# Altium PCB mainV2.PcbDoc (part 2 of 2)
Units mm, origin at the board's own origin, x right, y up, seen from the top; angles counter-clockwise.
Board outline 72.95 x 37.26 mm, 2 copper layers (Top Layer, Bottom Layer); 97 components, 79 nets, 317 pads, 139 vias.
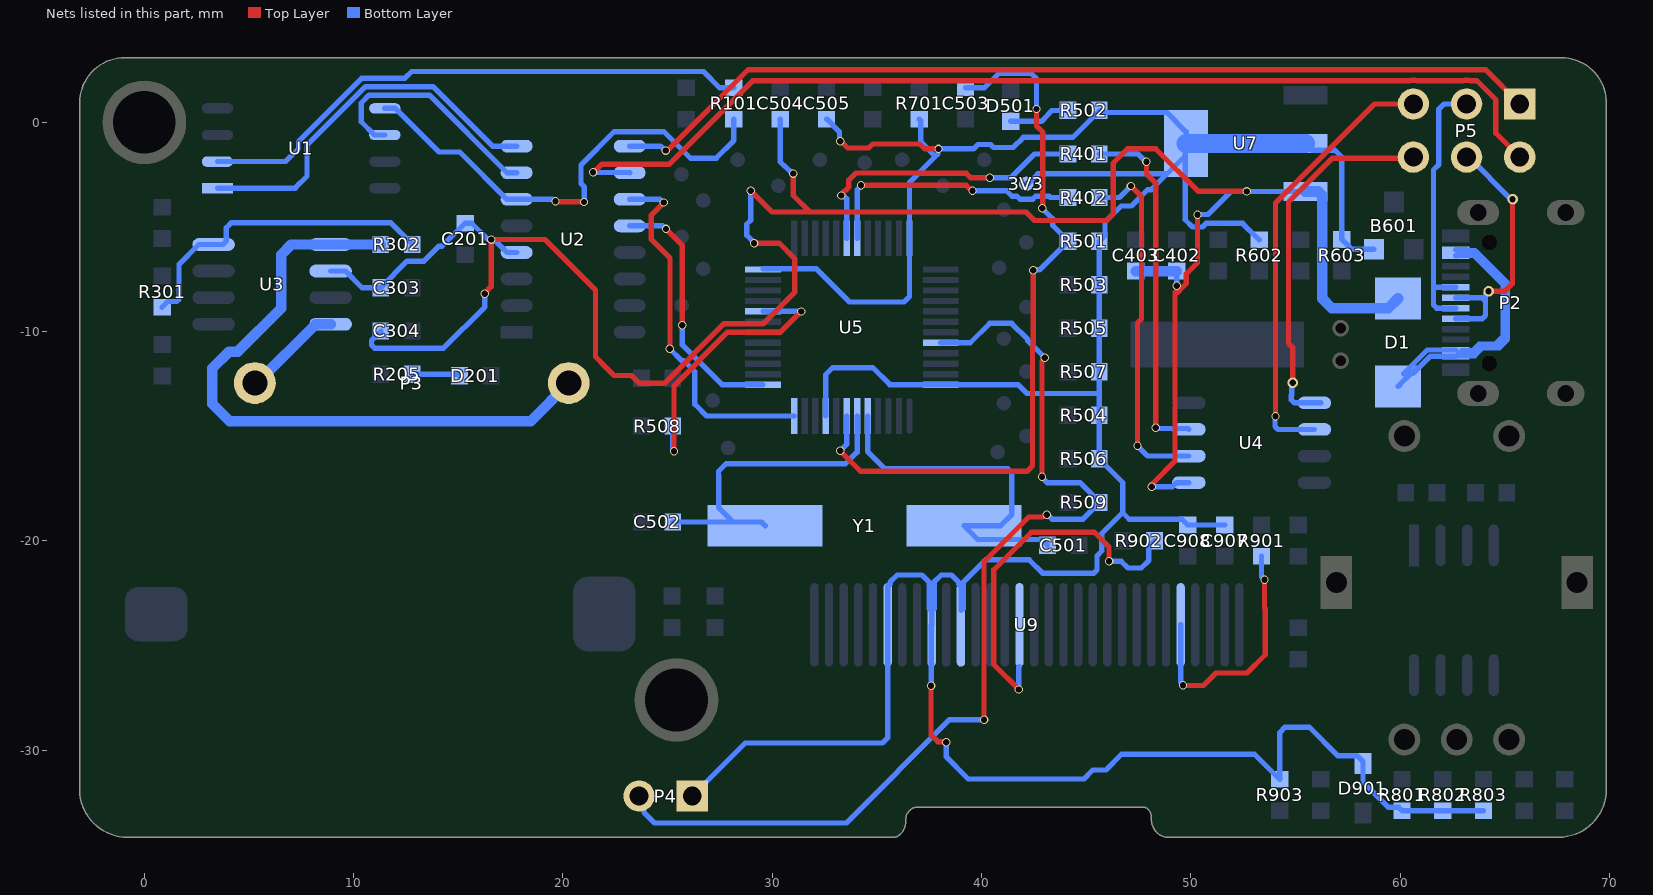
[diagram p2: the nets of this part, all layers, seen from the top]

## Via types
v1: diameter 0.4, hole 0.3, Top Layer to Bottom Layer, 136 vias
v2: diameter 0.5, hole 0.3, Top Layer to Bottom Layer, 3 vias

## Nets (pads, with @x,y where several pads share a name; then routed paths per layer and width w, separated by ;. In a path a pad name is that pad's centre, name@x,y a point inside that pad or via, vN(x,y) a via of type N, cw(c..) or ccw(c..) an arc to the next point about the centre after c; other vN are vias at no path point) (continued)
NetD1_1: D1.1 P2.A4 P2.A9 P2.B4 P2.B9 | length 23.5
  Bottom Layer w0.254: D1.1@59.899,-12.616 D1.1@59.955,-12.56 ; D1.1@59.978,-12.56 D1.1@59.955,-12.56 ; D1.1@60.168,-12.01 61.299,-10.88 P2.B4@62.663,-10.88 ; P2.B9@62.663,-6.38 62.745,-6.355 62.775,-6.346 63.513,-6.346 64.918,-7.751 64.918,-10.229 64.554,-10.593 63.789,-10.593 63.463,-10.918 62.944,-10.918 P2.A9@62.713,-11.149 ; P2.A4@62.663,-6.08 63.163,-6.08 63.204,-6.121 63.573,-6.121 65.128,-7.677 65.128,-10.376 64.74,-10.764 63.947,-10.764 63.562,-11.149 P2.A9@62.713,-11.149 ; D1.1@59.955,-12.56 60.571,-11.944 60.594,-11.944 60.795,-11.743 60.621,-11.994 61.435,-11.18 P2.A9@62.663,-11.18 62.694,-11.149 P2.A9@62.713,-11.149
NetD201_1: D201.1 R205.1 | length 2.3
  Bottom Layer w0.254: R205.1@12.799,-12.035 14.979,-12.035 D201.1@15.056,-12.112
NetD501_1: D501.1 R502.1 | length 3
  Bottom Layer w0.254: D501.1@41.398,0.05 42.867,0.05 43.211,0.394 43.211,0.421 43.36,0.57 R502.1@44.131,0.57
NetP4_2: P4.2 R509.2 U5.44 | length 48.9
  Top Layer w0.254: v1(40.124,-28.541) 40.117,-28.534 40.117,-20.995 42.255,-18.857 42.92,-18.857 43.006,-18.771 43.092,-18.771 v1(43.12,-18.743) ; v1(42.889,-16.935) 42.889,-11.417 43.021,-11.285 v1(43.021,-11.245)
  Bottom Layer w0.254: P4.2@23.639,-32.188 23.877,-32.426 23.877,-32.972 24.381,-33.476 33.544,-33.476 38.479,-28.541 v1(40.124,-28.541) ; U5.44@38.058,-10.532 39.464,-10.532 40.392,-9.604 41.438,-9.604 42.216,-10.382 42.216,-10.44 v1(43.021,-11.245) ; v1(42.889,-16.935) 42.889,-16.975 43.129,-17.215 44.699,-17.215 45.631,-18.147 45.631,-18.177 44.85,-18.958 43.374,-18.958 43.159,-18.743 v1(43.12,-18.743)
NetR301_1: R301.1 R302.2 U3.4 | length 15.4
  Bottom Layer w0.254: R301.1@0.847,-8.837 1.12,-8.564 1.546,-8.564 1.652,-8.458 1.652,-6.783 2.599,-5.836 U3.4@3.31,-5.836 3.749,-5.836 3.913,-5.672 3.913,-5.042 4.165,-4.79 11.768,-4.79 12.799,-5.821 R302.2@12.799,-5.836
NetR401_1: R401.1 U4.7 | length 16.9
  Top Layer w0.254: v1(47.88,-1.878) 47.88,-2.46 48.321,-2.901 v1(48.321,-14.597)
  Bottom Layer w0.254: R401.1@45.631,-1.511 47.474,-1.511 47.84,-1.878 v1(47.88,-1.878) ; v1(48.321,-14.597) 48.349,-14.625 49.86,-14.625 U4.7@49.909,-14.674
NetR402_1: R402.1 U4.6 | length 17.1
  Top Layer w0.254: v1(47.138,-3.04) 47.642,-3.544 47.642,-9.387 47.453,-9.576 v1(47.453,-15.458)
  Bottom Layer w0.254: R402.1@45.631,-3.593 46.585,-3.593 v1(47.138,-3.04) ; v1(47.453,-15.458) 47.939,-15.944 U4.6@49.909,-15.944
NetR508_1: R508.1 U5.20 | length 13.7
  Top Layer w0.254: v1(25.305,-15.717) 25.305,-12.589 27.868,-10.026 30.394,-10.026 v1(31.384,-9.035)
  Bottom Layer w0.254: R508.1@25.25,-14.51 25.25,-15.623 25.305,-15.677 v1(25.305,-15.717) ; U5.20@29.558,-9.032 31.381,-9.032 v1(31.384,-9.035) v1@31.388,-9.039
NetR901_1: R901.1 U9.26 | length 12.3
  Top Layer w0.254: v1(49.63,-26.896) 49.644,-26.91 50.602,-26.91 51.198,-26.315 52.679,-26.315 53.557,-25.437 53.557,-23.232 53.522,-23.198 v1(53.522,-21.849)
  Bottom Layer w0.254: U9.26@49.516,-24.009 49.516,-26.742 49.63,-26.856 v1(49.63,-26.896) ; R901.1@53.377,-20.737 53.377,-21.704 v1(53.522,-21.849)
NetR902_1: R902.1 U9.15 | length 17.8
  Top Layer w0.254: v1(41.783,-27.099) 40.586,-25.902 40.586,-21.38 42.382,-19.584 45.391,-19.584 46.095,-20.288 v1(46.095,-20.967)
  Bottom Layer w0.254: v1(41.783,-27.099) 41.783,-26.039 U9.15@41.816,-26.006 ; v1(46.095,-20.967) 46.104,-20.976 46.676,-20.976 46.995,-21.296 47.631,-21.296 47.993,-20.934 47.993,-20.267 R902.1@48.266,-19.994
OSC_IN: C501.1 U5.5 Y1.2 | length 17.9
  Bottom Layer w0.254: U5.5@34.558,-14.032 34.558,-15.723 35.371,-16.536 41.251,-16.536 41.449,-16.734 41.449,-18.736 40.912,-19.273 Y1.2@39.162,-19.273 39.82,-19.931 42.881,-19.931 C501.1@43.154,-20.204
OSC_OUT: C502.1 U5.6 Y1.1 | length 15.9
  Bottom Layer w0.254: C502.1@25.25,-19.093 Y1.1@28.133,-19.093 ; Y1.1@29.662,-19.273 29.482,-19.093 Y1.1@28.133,-19.093 ; U5.6@34.058,-14.032 34.058,-15.756 33.502,-16.312 27.79,-16.312 27.433,-16.669 27.433,-16.879 27.44,-16.886 27.44,-18.4 Y1.1@28.133,-19.093
RESET: C503.1 R501.1 U5.7 | length 35.3
  Top Layer w0.254: v1(33.25,-15.696) 34.23,-16.676 42.175,-16.676 42.44,-16.412 42.44,-10.695 42.469,-10.666 v1(42.469,-7.073) ; v1(42.63,0.635) 42.63,-0.17 42.924,-0.464 42.924,-4.09 v1(42.903,-4.111)
  Bottom Layer w0.254: v1(33.25,-15.696) 33.558,-15.388 U5.7@33.558,-14.032 ; C503.1@39.235,1.651 40.135,1.651 40.825,2.341 42.376,2.341 42.63,2.087 v1(42.63,0.635) ; v1(42.469,-7.073) 42.497,-7.045 42.775,-7.045 44.131,-5.689 R501.1@44.131,-5.674 44.131,-5.659 43.405,-4.932 43.405,-4.613 v1(42.903,-4.111)
RXD: R402.2 U5.31 | length 12.9
  Top Layer w0.254: v1(34.244,-3.005) 39.265,-3.005 39.531,-3.271 v1(39.571,-3.271)
  Bottom Layer w0.254: U5.31@34.058,-5.532 34.058,-3.227 34.244,-3.041 v1(34.244,-3.005) ; v1(39.571,-3.271) 41.204,-3.271 41.463,-3.53 41.697,-3.53 41.836,-3.669 42.442,-3.669 42.581,-3.53 43.229,-3.53 43.292,-3.593 R402.2@44.131,-3.593
RXD2: U2.12 U5.13 | length 12.3
  Top Layer w0.254: v1(24.927,-5.091) 25.697,-5.861 v1(25.697,-9.7)
  Bottom Layer w0.254: U2.12@23.188,-4.947 24.743,-4.947 24.887,-5.091 v1(24.927,-5.091) ; v1(25.697,-9.7) 25.697,-10.621 27.608,-12.532 U5.13@29.558,-12.532
SPI_CS: U1.1 U2.8 | length 18.4
  Bottom Layer w0.254: U1.1@3.493,-3.144 7.204,-3.144 7.77,-2.578 7.77,-1.09 10.563,1.703 13.795,1.703 16.636,-1.137 U2.8@17.788,-1.137
SPI_DIO: R101.2 U1.5 U2.6 | length 23.1
  Top Layer w0.254: v1(19.642,-3.775) 19.656,-3.789 20.993,-3.789 v1(21.007,-3.803)
  Bottom Layer w0.254: U1.5@11.493,0.666 11.993,0.666 14.075,-1.416 15.07,-1.416 17.331,-3.677 U2.6@17.788,-3.677 19.504,-3.677 19.602,-3.775 v1(19.642,-3.775) ; v1(21.007,-3.803) 21.026,-3.784 21.026,-3.095 20.86,-2.929 20.86,-2.038 22.447,-0.451 24.833,-0.451 26.099,-1.717 27.321,-1.717 28.168,-0.87 R101.2@28.168,0.151
SPI_DO: R101.1 U1.2 | length 27
  Bottom Layer w0.254: U1.2@3.493,-1.874 6.752,-1.874 7.364,-1.262 7.364,-0.921 10.395,2.11 12.453,2.11 12.775,2.432 26.707,2.432 27.488,1.651 R101.1@28.168,1.651
SPI_SCK: U1.6 U2.7 | length 11.4
  Bottom Layer w0.254: U1.6@11.493,-0.604 10.993,-0.604 10.362,0.027 10.362,0.927 10.732,1.297 13.627,1.297 17.331,-2.407 U2.7@17.788,-2.407
SPK+: P3.1 U3.8 | length 4.8
  Bottom Layer w0.5: P3.1@5.279,-12.455 5.378,-12.455 8.187,-9.646 U3.8@8.898,-9.646
SPK-: P3.2 R302.1 U3.5 | length 31.8
  Bottom Layer w0.5: R302.1@11.299,-5.836 U3.5@8.898,-5.836 7.025,-5.836 6.531,-6.33 6.531,-8.878 4.459,-10.95 4.046,-10.95 3.241,-11.755 3.241,-13.442 4.081,-14.282 18.452,-14.282 P3.2@20.279,-12.455
TXD: R401.2 U5.30 | length 14.3
  Top Layer w0.254: v1(33.292,-3.495) 33.292,-3.456 33.663,-3.084 33.663,-2.764 34.003,-2.424 37.072,-2.424 37.079,-2.431 39.266,-2.431 39.476,-2.641 v1(40.397,-2.641)
  Bottom Layer w0.254: v1(33.292,-3.495) 33.397,-3.495 33.558,-3.656 U5.30@33.558,-5.532 ; v1(40.397,-2.641) 41.402,-2.641 42.532,-1.511 R401.2@44.131,-1.511
TXD2: U2.11 U5.12 | length 17.5
  Top Layer w0.254: v1(24.822,-3.831) 24.227,-4.426 24.227,-5.602 25.116,-6.491 25.116,-10.807 v1(25.104,-10.819)
  Bottom Layer w0.254: U2.11@23.188,-3.677 24.628,-3.677 24.782,-3.831 v1(24.822,-3.831) ; v1(25.104,-10.819) 25.673,-11.388 25.773,-11.388 26.302,-11.917 26.302,-13.471 26.863,-14.032 U5.12@31.058,-14.032
UD+: P5.6 U4.1 | length 17.9
  Top Layer w0.254: v2(54.873,-12.448) 54.873,-10.767 54.768,-10.662 54.669,-10.563 54.669,-3.804 56.762,-1.711 60.586,-1.711 P5.6@60.636,-1.661
  Bottom Layer w0.254: v2(54.873,-12.448) 54.826,-12.495 54.826,-13.025 54.806,-13.045 54.806,-13.255 54.955,-13.404 U4.1@56.224,-13.404
UD-: P5.5 U4.2 | length 21.2
  Top Layer w0.254: v1(54.047,-14.037) 54.047,-3.851 58.777,0.879 P5.5@60.636,0.879
  Bottom Layer w0.254: v1(54.047,-14.037) 54.047,-14.077 54.019,-14.104 54.019,-14.525 54.168,-14.674 U4.2@55.909,-14.674
USB_D+: P2.A6 P2.B6 P5.4 | length 12.5
  Top Layer w0.254: v2(64.225,-8.066) 65.016,-8.066 65.373,-7.709 v2(65.373,-3.677)
  Bottom Layer w0.254: P2.B6@62.663,-9.38 63.929,-9.38 64.078,-9.231 64.078,-8.551 ; P2.A6@62.663,-8.38 63.489,-8.38 63.49,-8.381 63.908,-8.381 64.078,-8.551 ; P5.4@63.176,-1.661 63.29,-1.661 65.306,-3.677 v2(65.373,-3.677) ; v2(64.225,-8.066) 64.078,-8.213 64.078,-8.551
USB_D-: P2.A7 P2.B7 P5.3 | length 13.1
  Bottom Layer w0.254: P2.A7@62.663,-8.88 61.751,-8.88 61.593,-8.722 61.593,-7.994 ; P2.B7@62.663,-7.88 61.707,-7.88 61.593,-7.994 ; P5.3@63.176,0.879 62.095,0.879 61.852,0.636 61.852,-2.005 61.593,-2.264 61.593,-7.88 61.593,-7.994
USB_N: P5.1 U2.9 | length 44.9
  Top Layer w0.254: v1(24.91,-1.35) 24.949,-1.35 25.022,-1.277 25.061,-1.277 25.28,-1.058 28.856,2.518 64.077,2.518 P5.1@65.716,0.879
  Bottom Layer w0.254: U2.9@23.188,-1.137 24.657,-1.137 24.87,-1.35 v1(24.91,-1.35)
USB_P: P5.2 U2.10 | length 50.3
  Top Layer w0.254: v1(21.441,-2.382) 21.48,-2.382 21.868,-1.995 25.086,-1.995 25.498,-1.583 29.073,1.992 60.437,1.992 cw(c60.636,0.879) 60.835,1.992 62.977,1.992 cw(c63.176,0.879) 63.379,1.992 63.663,1.992 64.57,1.084 64.57,-0.515 P5.2@65.716,-1.661
  Bottom Layer w0.254: v1(21.441,-2.382) 21.454,-2.395 23.175,-2.395 U2.10@23.188,-2.407
VDD3V3: 3V3.1 B601.2 C505.1 C907.2 C908.2 D901.2 P4.1 R501.2 R502.2 R503.2 R504.2 R505.2 R506.2 R507.2 R602.2 R603.2 R701.1 R801.1 R802.1 R803.1 R903.2 U5.9 U5.24 U5.36 U5.48 U7.2 U9.6 U9.9 U9.11 | length 182.6
  Top Layer w0.254: v1(33.246,-0.902) 33.285,-0.902 33.61,-1.227 34.609,-1.227 34.804,-1.031 37.049,-1.031 37.286,-1.269 v1(37.947,-1.269) ; v1(37.59,-26.917) 37.59,-29.269 37.912,-29.591 38.29,-29.591 v1(38.318,-29.619)
  Bottom Layer w0.254: P4.1@26.179,-32.188 28.713,-29.654 35.273,-29.654 35.516,-29.411 35.516,-22.169 35.635,-22.05 35.635,-21.968 35.975,-21.628 37.156,-21.628 37.497,-21.968 37.497,-23.242 37.548,-23.242 U9.9@37.616,-23.309 ; U5.24@29.558,-7.001 32.115,-7.001 33.698,-8.584 36.295,-8.584 36.558,-8.321 U5.36@36.558,-5.532 36.558,-2.866 37.791,-1.632 ; U5.9@32.558,-14.032 32.558,-12.048 32.879,-11.727 34.818,-11.727 35.623,-12.532 U5.48@38.058,-12.532 41.739,-12.532 42.166,-12.959 45.631,-12.959 ; C505.1@32.595,0.151 32.61,0.151 33.218,-0.457 33.218,-0.874 v1(33.246,-0.902) ; R701.1@37.022,0.151 37.103,0.069 37.103,-0.944 37.791,-1.632 ; v1(37.59,-26.917) 37.603,-26.904 37.603,-24.022 U9.9@37.616,-24.009 U9.9@37.616,-23.309 ; v1(38.318,-29.619) 38.318,-30.326 39.367,-31.375 44.889,-31.375 45.315,-30.949 45.941,-30.949 46.697,-30.193 53.046,-30.193 54.242,-31.389 R903.2@54.257,-31.389 54.257,-29.15 54.509,-28.898 55.658,-28.898 57.017,-30.257 57.938,-30.257 58.226,-30.545 D901.2@58.226,-30.63 58.226,-31.511 59.445,-32.73 59.933,-32.73 R801.1@60.092,-32.889 R802.1@62.037,-32.889 R803.1@63.982,-32.889 ; U9.11@39.016,-23.309 39.016,-22.169 38.897,-22.05 38.897,-21.968 38.556,-21.628 38.075,-21.628 37.735,-21.968 37.735,-23.242 37.683,-23.242 U9.9@37.616,-23.309 ; U9.11@39.083,-23.242 39.135,-23.242 39.135,-21.968 40.199,-20.904 42.28,-20.904 42.917,-21.541 45.365,-21.541 45.514,-21.392 45.514,-20.712 45.743,-20.483 45.743,-19.643 46.75,-18.635 ; 3V3.1@42.139,-2.938 42.215,-2.938 42.694,-2.459 U7.2@48.782,-2.459 ; C907.2@51.616,-19.237 C908.2@49.854,-19.237 49.581,-18.964 47.058,-18.964 46.75,-18.656 46.75,-18.635 ; R602.2@53.276,-5.608 53.261,-5.608 52.48,-4.827 50.732,-4.827 50.559,-4.999 50.078,-4.999 49.735,-4.656 U7.2@49.735,-1.594 ; U7.2@55.476,-1.003 55.799,-1.326 56.876,-1.326 57.218,-1.668 R603.2@57.218,-5.601 57.233,-5.601 57.694,-6.062 B601.2@58.753,-6.062 ; 37.791,-1.632 37.919,-1.504 37.919,-1.297 v1(37.947,-1.269) 39.618,-1.269 39.828,-1.059 40.434,-1.059 40.574,-1.199 41.513,-1.199 41.997,-0.715 44.361,-0.715 45.631,0.555 R502.2@45.631,0.57 45.731,0.47 48.853,0.47 49.776,-0.453 U7.2@49.776,-1.003 49.735,-1.044 U7.2@49.735,-1.594 ; 45.631,-12.959 R507.2@45.631,-11.918 R505.2@45.631,-9.837 R503.2@45.631,-7.755 R501.2@45.631,-5.674 45.904,-5.401 45.904,-4.77 46.675,-3.999 47.159,-3.999 47.936,-3.222 48.107,-3.222 U7.2@49.735,-1.594 ; 45.631,-12.959 R504.2@45.631,-13.999 R506.2@45.631,-16.081 45.631,-16.096 46.75,-17.215 46.75,-18.635
  Bottom Layer w0.9: U7.2@49.776,-1.003 U7.2@55.476,-1.003
VDD5V: C201.2 C303.1 C304.1 C402.2 C403.2 C504.1 D1.2 U2.4 U3.6 U4.5 U7.3 | length 116.4
  Top Layer w0.254: v1(16.268,-8.192) 16.268,-8.152 16.569,-7.852 v1(16.569,-5.602) 19.138,-5.602 21.553,-8.017 21.553,-11.201 22.066,-11.715 22.066,-11.716 22.443,-12.093 23.284,-12.093 23.66,-12.469 24.851,-12.469 27.7,-9.62 29.582,-9.62 31.073,-8.129 31.073,-6.505 30.345,-5.777 v1(29.134,-5.777) ; v1(28.98,-3.271) 29.995,-4.286 31.801,-4.286 ; v1(31.003,-2.448) 31.003,-3.488 31.801,-4.286 ; v1(48.132,-17.411) 48.16,-17.383 48.16,-17.271 49.245,-16.186 49.245,-8.115 49.371,-8.115 49.486,-8 49.784,-7.702 49.784,-7.24 50.316,-6.708 50.316,-4.421 v1(50.319,-4.418) ; v1(49.333,-7.807) 49.333,-7.847 49.447,-7.96 49.447,-8.039 ; v1(52.675,-3.299) 50.358,-3.299 48.321,-1.262 46.984,-1.262 46.29,-1.956 46.29,-4.384 45.982,-4.692 42.539,-4.692 42.133,-4.286 31.801,-4.286
  Bottom Layer w0.254: U3.6@8.898,-7.106 9.609,-7.106 10.406,-7.902 C303.1@11.299,-7.902 11.299,-7.887 12.554,-6.632 13.357,-6.632 14.073,-5.916 14.223,-5.916 15.317,-4.822 C201.2@15.332,-4.822 15.642,-4.822 16.422,-5.602 v1(16.569,-5.602) 16.716,-5.602 17.331,-6.217 U2.4@17.788,-6.217 ; C304.1@11.299,-9.969 11.299,-9.984 10.853,-10.43 10.853,-10.64 11.002,-10.789 14.294,-10.789 16.268,-8.815 v1(16.268,-8.192) ; v1(28.98,-3.271) 28.98,-4.673 28.784,-4.869 28.784,-5.388 29.134,-5.737 v1(29.134,-5.777) ; C504.1@30.381,0.151 30.381,-1.893 30.561,-2.073 30.589,-2.073 30.963,-2.448 v1(31.003,-2.448) ; v1(48.132,-17.411) 49.119,-17.411 49.316,-17.214 U4.5@49.909,-17.214 ; v1(49.333,-7.807) C402.2@49.333,-7.108 ; v1(50.319,-4.418) 50.332,-4.405 50.813,-4.405 51.915,-3.303 52.675,-3.303 U7.3@55.476,-3.303
  Bottom Layer w0.508: C403.2@47.362,-7.108 C402.2@49.333,-7.108 ; U7.3@55.476,-3.303 56.076,-3.303 56.272,-3.499 56.272,-3.787 56.282,-3.797 56.282,-8.418 56.742,-8.878 59.437,-8.878 D1.2@59.899,-8.416
pads on no net: P2. P2.A5 P2.A8 P2.B5 P2.B8 U2.2 U2.13 U4.4 U5.1 U5.41 U6.3 U6.7 U9.7
copper on no net: | length 520.1
  Top Layer w0.051: -1.682,-23.102 -1.479,-23.102 ; -1.682,-23.051 -1.479,-23.051 ; -1.682,-23 -1.123,-23 ; -1.682,-22.949 -1.174,-22.949 ; -1.682,-22.898 -1.174,-22.898 ; -1.631,-23.203 -1.072,-23.203 ; -1.631,-23.152 -1.072,-23.152 ; -1.631,-22.848 -1.225,-22.848 ; -1.58,-23.356 -1.072,-23.356 ; -1.58,-23.305 -1.022,-23.305 ; -1.58,-23.254 -1.022,-23.254 ; -1.53,-23.406 -1.072,-23.406 ; -1.53,-22.797 -1.377,-22.797 ; -1.479,-23.457 -1.123,-23.457 ; -1.377,-23.508 -1.276,-23.508 ; -1.326,-23.102 -1.072,-23.102 ; -1.326,-23.051 -1.123,-23.051 ; -0.971,-23.508 -0.768,-23.508 ; -0.971,-23.457 -0.768,-23.457 ; -0.971,-23.406 -0.717,-23.406 ; -0.971,-23.356 -0.412,-23.356 ; -0.971,-23.305 -0.463,-23.305 ; -0.92,-23.66 -0.31,-23.66 ; -0.92,-23.61 -0.31,-23.61 ; -0.92,-23.559 -0.717,-23.559 ; -0.92,-23.254 -0.514,-23.254 ; -0.869,-23.711 -0.361,-23.711 ; -0.869,-23.203 -0.564,-23.203 ; -0.818,-23.762 -0.361,-23.762 ; -0.768,-23.813 -0.412,-23.813 ; -0.666,-23.559 -0.31,-23.559 ; -0.666,-23.508 -0.31,-23.508 ; -0.666,-23.457 -0.361,-23.457 ; -0.666,-23.406 -0.361,-23.406 ; -0.361,-33.363 4.82,-33.363 ; -0.361,-33.312 4.871,-33.312 ; -0.31,-33.262 4.922,-33.262 ; -0.31,-33.211 4.973,-33.211 ; -0.31,-33.16 4.973,-33.16 ; -0.31,-33.109 5.024,-33.109 ; -0.31,-33.058 5.024,-33.058 ; -0.26,-33.008 5.074,-33.008 ; -0.26,-32.957 5.074,-32.957 ; -0.26,-32.906 5.125,-32.906 ; -0.26,-32.855 5.125,-32.855 ; -0.26,-32.804 5.125,-32.804 ; -0.26,-24.067 0.045,-24.067 ; -0.26,-24.016 -0.006,-24.016 ; -0.26,-23.965 -0.006,-23.965 ; -0.26,-23.914 -0.006,-23.914 ; -0.26,-23.864 0.045,-23.864 ; -0.26,-23.813 0.502,-23.813 ; -0.26,-23.762 0.401,-23.762 ; -0.26,-23.711 0.35,-23.711 ; -0.26,-23.66 0.299,-23.66 ; -0.26,-23.61 0.248,-23.61 ; -0.26,-23.559 0.248,-23.559 ; -0.209,-27.724 1.62,-27.724 ; -0.209,-27.674 1.925,-27.674 ; -0.209,-27.623 0.401,-27.623 ; -0.209,-27.47 0.35,-27.47 ; -0.209,-27.42 0.35,-27.42 ; -0.209,-27.318 0.35,-27.318 ; -0.209,-27.267 0.35,-27.267 ; -0.209,-24.168 0.096,-24.168 ; -0.209,-24.118 0.045,-24.118 ; -0.209,-23.508 0.198,-23.508 ; -0.209,-23.457 0.147,-23.457 ; -0.158,-28.232 0.35,-28.232 ; -0.158,-28.182 0.299,-28.182 ; -0.158,-28.131 0.299,-28.131 ; -0.158,-28.08 0.299,-28.08 ; -0.158,-28.029 0.553,-28.029 ; -0.158,-27.775 1.214,-27.775 ; -0.158,-27.572 0.35,-27.572 ; -0.158,-27.521 0.35,-27.521 ; -0.158,-27.369 0.35,-27.369 ; -0.158,-27.216 0.35,-27.216 ; -0.158,-27.166 0.35,-27.166 ; -0.158,-27.115 0.401,-27.115 ; -0.158,-27.064 0.401,-27.064 ; -0.158,-27.013 0.401,-27.013 ; -0.158,-26.962 0.401,-26.962 ; -0.158,-26.912 0.401,-26.912 ; -0.158,-24.219 0.147,-24.219 ; -0.158,-23.406 -0.006,-23.406 ; -0.107,-28.385 0.35,-28.385 ; -0.107,-28.334 0.35,-28.334 ; -0.107,-28.283 0.35,-28.283 ; -0.107,-27.978 0.604,-27.978 ; -0.107,-27.928 0.706,-27.928 ; -0.107,-27.877 0.909,-27.877 ; -0.107,-27.826 1.061,-27.826 ; -0.107,-26.861 0.401,-26.861 ; -0.107,-26.81 0.35,-26.81 ; -0.107,-24.27 0.198,-24.27 ; -0.056,-32.754 5.176,-32.754 ; -0.056,-32.703 5.176,-32.703 ; -0.056,-32.652 0.35,-32.652 ; -0.056,-28.69 1.925,-28.69 ; -0.056,-28.639 1.925,-28.639 ; -0.056,-28.588 0.401,-28.588 ; -0.056,-28.537 0.35,-28.537 ; -0.056,-28.486 0.35,-28.486 ; -0.056,-28.436 0.35,-28.436 ; -0.056,-26.759 0.35,-26.759 ; -0.056,-26.708 0.35,-26.708 ; -0.056,-26.658 0.401,-26.658 ; -0.056,-26.607 0.401,-26.607 ; -0.056,-26.556 0.401,-26.556 ; -0.056,-26.505 0.401,-26.505 ; -0.056,-24.321 0.248,-24.321 ; -0.006,-32.601 0.35,-32.601 ; -0.006,-32.55 0.35,-32.55 ; -0.006,-32.5 0.35,-32.5 ; -0.006,-32.449 0.401,-32.449 ; -0.006,-32.398 0.401,-32.398 ; -0.006,-32.347 0.401,-32.347 ; -0.006,-32.296 0.401,-32.296 ; -0.006,-28.842 1.925,-28.842 ; -0.006,-28.791 1.925,-28.791 ; -0.006,-28.74 1.925,-28.74 ; -0.006,-26.454 0.401,-26.454 ; -0.006,-26.404 0.452,-26.404 ; -0.006,-26.353 0.452,-26.353 ; -0.006,-26.302 0.452,-26.302 ; -0.006,-24.422 0.35,-24.422 ; -0.006,-24.372 0.299,-24.372 ; 0.045,-32.246 0.452,-32.246 ; 0.045,-32.195 0.452,-32.195 ; 0.045,-29.401 2.128,-29.401 ; 0.045,-29.35 0.452,-29.35 ; 0.045,-29.299 0.452,-29.299 ; 0.045,-29.248 0.452,-29.248 ; 0.045,-29.198 2.077,-29.198 ; 0.045,-29.147 2.077,-29.147 ; 0.045,-29.096 2.077,-29.096 ; 0.045,-29.045 2.077,-29.045 ; 0.045,-28.994 2.026,-28.994 ; 0.045,-28.944 2.026,-28.944 ; 0.045,-28.893 1.976,-28.893 ; 0.045,-26.251 0.452,-26.251 ; 0.045,-26.2 0.452,-26.2 ; 0.045,-26.15 0.452,-26.15 ; 0.045,-26.099 0.502,-26.099 ; 0.045,-24.473 0.401,-24.473 ; 0.096,-32.144 0.452,-32.144 ; 0.096,-32.093 0.452,-32.093 ; 0.096,-32.042 0.452,-32.042 ; 0.096,-31.992 0.452,-31.992 ; 0.096,-29.96 0.553,-29.96 ; 0.096,-29.909 0.553,-29.909 ; 0.096,-29.858 0.502,-29.858 ; 0.096,-29.807 0.502,-29.807 ; 0.096,-29.756 2.179,-29.756 ; 0.096,-29.706 0.553,-29.706 ; 0.096,-29.655 0.553,-29.655 ; 0.096,-29.604 0.502,-29.604 ; 0.096,-29.553 0.502,-29.553 ; 0.096,-29.502 0.502,-29.502 ; 0.096,-29.452 0.502,-29.452 ; 0.096,-26.048 0.502,-26.048 ; 0.096,-25.997 0.502,-25.997 ; 0.096,-25.946 0.553,-25.946 ; 0.096,-23.864 0.553,-23.864 ; 0.147,-31.941 0.502,-31.941 ; 0.147,-31.89 0.502,-31.89 ; 0.147,-31.839 0.502,-31.839 ; 0.147,-31.788 0.502,-31.788 ; 0.147,-31.738 0.502,-31.738 ; 0.147,-31.687 0.502,-31.687 ; 0.147,-31.636 0.502,-31.636 ; 0.147,-31.433 0.553,-31.433 ; 0.147,-31.382 0.553,-31.382 ; 0.147,-31.128 0.553,-31.128 ; 0.147,-31.077 0.553,-31.077 ; 0.147,-31.026 0.553,-31.026 ; 0.147,-30.976 0.553,-30.976 ; 0.147,-30.925 0.553,-30.925 ; 0.147,-30.874 0.553,-30.874 ; 0.147,-30.823 0.553,-30.823 ; 0.147,-30.772 0.553,-30.772 ; 0.147,-30.722 0.553,-30.722 ; 0.147,-30.671 0.553,-30.671 ; 0.147,-30.62 0.553,-30.62 ; 0.147,-30.569 0.553,-30.569 ; 0.147,-30.468 0.553,-30.468 ; 0.147,-30.417 0.553,-30.417 ; 0.147,-30.366 0.553,-30.366 ; 0.147,-30.315 0.553,-30.315 ; 0.147,-30.264 0.553,-30.264 ; 0.147,-30.214 0.553,-30.214 ; 0.147,-30.163 0.553,-30.163 ; 0.147,-30.112 0.553,-30.112 ; 0.147,-30.061 0.553,-30.061 ; 0.147,-30.01 0.553,-30.01 ; 0.147,-25.896 0.553,-25.896 ; 0.147,-25.845 0.553,-25.845 ; 0.147,-25.794 0.553,-25.794 ; 0.147,-24.524 0.452,-24.524 ; 0.198,-31.585 0.502,-31.585 ; 0.198,-31.534 0.553,-31.534 ; 0.198,-31.484 0.553,-31.484 ; 0.198,-31.331 0.553,-31.331 ; 0.198,-31.28 0.553,-31.28 ; 0.198,-31.23 0.553,-31.23 ; 0.198,-31.179 0.553,-31.179 ; 0.198,-30.518 0.553,-30.518 ; 0.198,-25.743 0.604,-25.743 ; 0.198,-25.692 0.604,-25.692 ; 0.198,-25.642 0.655,-25.642 ; 0.198,-24.626 0.553,-24.626 ; 0.198,-24.575 0.502,-24.575 ; 0.198,-23.914 0.655,-23.914 ; 0.248,-25.591 0.655,-25.591 ; 0.248,-25.54 0.706,-25.54 ; 0.248,-24.676 0.553,-24.676 ; 0.248,-23.965 0.756,-23.965 ; 0.299,-25.489 0.706,-25.489 ; 0.299,-25.438 0.756,-25.438 ; 0.299,-24.727 0.655,-24.727 ; 0.299,-24.016 0.807,-24.016 ; 0.35,-25.388 0.756,-25.388 ; 0.35,-25.337 0.807,-25.337 ; 0.35,-25.286 0.807,-25.286 ; 0.35,-24.778 1.163,-24.778 ; 0.401,-25.235 0.858,-25.235 ; 0.401,-25.184 0.858,-25.184 ; 0.401,-24.829 1.112,-24.829 ; 0.401,-24.067 0.909,-24.067 ; 0.452,-28.588 1.874,-28.588 ; 0.452,-25.134 0.909,-25.134 ; 0.452,-25.083 0.909,-25.083 ; 0.452,-24.93 1.01,-24.93 ; 0.452,-24.88 1.061,-24.88 ; 0.452,-24.118 2.534,-24.118 ; 0.502,-29.35 2.128,-29.35 ; 0.502,-29.299 2.128,-29.299 ; 0.502,-29.248 2.077,-29.248 ; 0.502,-28.537 1.874,-28.537 ; 0.502,-28.486 1.823,-28.486 ; 0.502,-27.623 2.179,-27.623 ; 0.502,-25.032 0.96,-25.032 ; 0.502,-24.981 0.96,-24.981 ; 0.553,-29.502 2.128,-29.502 ; 0.553,-29.452 2.179,-29.452 ; 0.553,-27.572 2.433,-27.572 ; 0.553,-24.168 2.585,-24.168 ; 0.604,-29.807 2.179,-29.807 ; 0.604,-29.706 2.23,-29.706 ; 0.604,-29.655 2.23,-29.655 ; 0.604,-29.604 2.179,-29.604 ; 0.604,-29.553 2.179,-29.553 ; 0.604,-24.219 1.671,-24.219 ; 0.655,-30.468 2.128,-30.468 ; 0.655,-30.417 2.179,-30.417 ; 0.655,-30.214 2.179,-30.214 ; 0.655,-30.163 2.179,-30.163 ; 0.655,-30.112 2.179,-30.112 ; 0.655,-30.061 2.179,-30.061 ; 0.655,-30.01 2.179,-30.01 ; 0.655,-29.96 2.23,-29.96 ; 0.655,-29.909 2.23,-29.909 ; 0.655,-29.858 2.23,-29.858 ; 0.706,-30.62 2.026,-30.62 ; 0.706,-30.569 2.026,-30.569 ; 0.706,-30.518 2.077,-30.518 ; 0.706,-30.366 2.179,-30.366 ; 0.706,-30.315 2.179,-30.315 ; 0.706,-30.264 2.179,-30.264 ; 0.706,-28.436 1.772,-28.436 ; 0.706,-24.727 1.163,-24.727 ; 0.706,-24.676 1.214,-24.676 ; 0.706,-24.27 1.62,-24.27 ; 0.756,-30.671 1.417,-30.671 ; 0.756,-24.626 1.264,-24.626 ; 0.756,-24.575 1.315,-24.575 ; 0.807,-30.722 1.214,-30.722 ; 0.807,-28.385 1.772,-28.385 ; 0.807,-27.521 3.5,-27.521 ; 0.807,-24.524 1.366,-24.524 ; 0.807,-24.321 1.569,-24.321 ; 0.858,-28.334 1.772,-28.334 ; 0.858,-24.473 1.417,-24.473 ; 0.858,-24.372 1.518,-24.372 ; 0.909,-24.422 1.468,-24.422 ; 0.96,-27.47 4.668,-27.47 ; 1.01,-30.772 1.061,-30.772 ; 1.01,-28.283 1.722,-28.283 ; 1.061,-27.42 4.668,-27.42 ; 1.163,-28.232 1.671,-28.232 ; 1.214,-24.067 2.484,-24.067 ; 1.264,-24.016 2.484,-24.016 ; 1.315,-28.182 1.569,-28.182 ; 1.315,-23.965 2.433,-23.965 ; 1.366,-27.369 4.668,-27.369 ; 1.366,-23.914 2.382,-23.914 ; 1.417,-31.077 1.925,-31.077 ; 1.417,-31.026 2.839,-31.026 ; 1.417,-30.976 2.839,-30.976 ; 1.417,-30.925 2.839,-30.925 ; 1.417,-30.874 2.839,-30.874 ; 1.417,-23.864 2.382,-23.864 ; 1.468,-32.55 1.772,-32.55 ; 1.468,-32.5 1.772,-32.5 ; 1.468,-32.449 1.874,-32.449 ; 1.468,-32.398 1.823,-32.398 ; 1.468,-32.347 1.772,-32.347 ; 1.468,-31.331 1.772,-31.331 ; 1.468,-31.28 1.772,-31.28 ; 1.468,-31.23 1.772,-31.23 ; 1.468,-31.179 1.772,-31.179 ; 1.468,-31.128 1.772,-31.128 ; 1.468,-30.823 2.788,-30.823 ; 1.468,-23.813 2.331,-23.813 ; 1.518,-32.601 1.722,-32.601 ; 1.518,-32.296 1.772,-32.296 ; 1.518,-32.246 1.772,-32.246 ; 1.518,-32.195 1.772,-32.195 ; 1.518,-32.144 1.772,-32.144 ; 1.518,-32.093 1.772,-32.093 ; 1.518,-32.042 1.772,-32.042 ; 1.518,-31.992 1.772,-31.992 ; 1.518,-31.941 1.772,-31.941 ; 1.518,-31.89 1.772,-31.89 ; 1.518,-31.839 2.23,-31.839 ; 1.518,-31.788 1.772,-31.788 ; 1.518,-31.738 1.772,-31.738 ; 1.518,-31.687 1.772,-31.687 ; 1.518,-31.636 1.772,-31.636 ; 1.518,-31.585 1.772,-31.585 ; 1.518,-31.534 1.772,-31.534 ; 1.518,-31.484 1.772,-31.484 ; 1.518,-31.433 1.772,-31.433 ; 1.518,-31.382 1.772,-31.382 ; 1.518,-30.772 1.569,-30.772 ; 1.518,-23.762 2.28,-23.762 ; 1.569,-27.318 4.617,-27.318 ; 1.569,-23.711 2.28,-23.711 ; 1.62,-23.66 2.28,-23.66 ; 1.671,-26.302 1.925,-26.302 ; 1.671,-26.251 1.874,-26.251 ; 1.671,-26.2 1.874,-26.2 ; 1.671,-26.15 1.925,-26.15 ; 1.671,-26.099 2.382,-26.099 ; 1.671,-26.048 2.382,-26.048 ; 1.671,-25.997 2.331,-25.997 ; 1.722,-30.772 2.738,-30.772 ; 1.722,-30.671 1.976,-30.671 ; 1.722,-26.454 2.179,-26.454 ; 1.722,-26.404 1.976,-26.404 ; 1.722,-26.353 1.925,-26.353 ; 1.722,-25.946 2.331,-25.946 ; 1.722,-23.61 2.23,-23.61 ; 1.772,-30.722 1.925,-30.722 ; 1.772,-26.556 2.636,-26.556 ; 1.772,-26.505 2.687,-26.505 ; 1.772,-25.896 2.28,-25.896 ; 1.772,-23.559 2.179,-23.559 ; 1.823,-31.89 2.23,-31.89 ; 1.823,-31.788 2.23,-31.788 ; 1.823,-31.738 2.23,-31.738 ; 1.823,-31.687 2.23,-31.687 ; 1.823,-26.607 2.636,-26.607 ; 1.823,-23.508 2.128,-23.508 ; 1.874,-31.941 2.179,-31.941 ; 1.874,-31.636 2.179,-31.636 ; 1.874,-26.658 2.534,-26.658 ; 1.874,-25.845 2.28,-25.845 ; 1.874,-24.219 2.636,-24.219 ; 1.925,-31.992 2.077,-31.992 ; 1.925,-31.585 2.077,-31.585 ; 1.925,-24.27 2.687,-24.27 ; 1.976,-32.652 2.179,-32.652 ; 1.976,-26.708 2.484,-26.708 ; 1.976,-25.794 2.23,-25.794 ; 1.976,-25.743 2.23,-25.743 ; 1.976,-25.692 2.23,-25.692 ; 1.976,-25.642 2.28,-25.642 ; 1.976,-25.591 2.687,-25.591 ; 1.976,-25.54 2.687,-25.54 ; 1.976,-25.489 2.636,-25.489 ; 1.976,-24.321 2.738,-24.321 ; 2.026,-31.077 2.839,-31.077 ; 2.026,-25.438 2.585,-25.438 ; 2.026,-24.422 2.788,-24.422 ; 2.026,-24.372 2.788,-24.372 ; 2.077,-26.2 2.433,-26.2 ; 2.077,-26.15 2.433,-26.15 ; 2.077,-25.388 2.534,-25.388 ; 2.077,-24.473 2.839,-24.473 ; 2.128,-30.722 2.23,-30.722 ; 2.128,-30.671 2.23,-30.671 ; 2.128,-29.198 2.28,-29.198 ; 2.128,-29.147 2.28,-29.147 ; 2.128,-26.353 2.788,-26.353 ; 2.128,-26.302 2.788,-26.302 ; 2.128,-26.251 2.433,-26.251 ; 2.128,-24.524 2.89,-24.524 ; 2.179,-26.404 2.738,-26.404 ; 2.179,-25.337 2.382,-25.337 ; 2.179,-24.575 2.941,-24.575 ; 2.23,-30.62 2.331,-30.62 ; 2.23,-30.569 2.331,-30.569 ; 2.23,-28.131 3.703,-28.131 ; 2.23,-28.08 3.754,-28.08 ; 2.23,-28.029 3.754,-28.029 ; 2.23,-26.454 2.738,-26.454 ; 2.23,-24.676 2.992,-24.676 ; 2.23,-24.626 2.941,-24.626 ; 2.28,-32.652 2.738,-32.652 ; 2.28,-30.518 2.382,-30.518 ; 2.28,-28.283 3.703,-28.283 ; 2.28,-28.232 3.703,-28.232 ; 2.28,-28.182 3.703,-28.182 ; 2.28,-27.978 3.754,-27.978 ; 2.28,-27.928 3.754,-27.928 ; 2.28,-24.727 3.042,-24.727 ; 2.331,-30.468 2.534,-30.468 ; 2.331,-28.639 3.754,-28.639 ; 2.331,-28.588 3.754,-28.588 ; 2.331,-28.537 3.754,-28.537 ; 2.331,-28.486 3.754,-28.486 ; 2.331,-28.436 3.754,-28.436 ; 2.331,-28.385 3.754,-28.385 ; 2.331,-28.334 3.754,-28.334 ; 2.331,-27.877 2.534,-27.877 ; 2.331,-24.778 3.093,-24.778 ; 2.382,-30.417 3.855,-30.417 ; 2.382,-29.35 3.804,-29.35 ; 2.382,-29.299 3.804,-29.299 ; 2.382,-29.248 3.804,-29.248 ; 2.382,-29.198 3.804,-29.198 ; 2.382,-29.147 3.804,-29.147 ; 2.382,-29.096 3.804,-29.096 ; 2.382,-29.045 3.804,-29.045 ; 2.382,-28.994 3.804,-28.994 ; 2.382,-28.944 3.804,-28.944 ; 2.382,-28.893 3.804,-28.893 ; 2.382,-28.842 3.754,-28.842 ; 2.382,-28.791 3.754,-28.791 ; 2.382,-28.74 3.754,-28.74 ; 2.382,-28.69 3.754,-28.69 ; 2.382,-24.829 3.093,-24.829 ; 2.433,-32.601 2.738,-32.601 ; 2.433,-32.55 2.738,-32.55 ; 2.433,-31.128 2.788,-31.128 ; 2.433,-30.518 2.484,-30.518 ; 2.433,-30.366 3.855,-30.366 ; 2.433,-29.706 3.804,-29.706 ; 2.433,-29.655 3.804,-29.655 ; 2.433,-29.604 3.804,-29.604 ; 2.433,-29.553 3.804,-29.553 ; 2.433,-29.502 3.804,-29.502 ; 2.433,-29.452 3.804,-29.452 ; 2.433,-29.401 3.804,-29.401 ; 2.433,-25.743 2.788,-25.743 ; 2.433,-25.692 2.738,-25.692 ; 2.433,-25.642 2.738,-25.642 ; 2.433,-24.88 3.144,-24.88 ; 2.484,-32.5 2.788,-32.5 ; 2.484,-32.449 2.788,-32.449 ; 2.484,-32.398 2.788,-32.398 ; 2.484,-32.347 2.788,-32.347 ; 2.484,-32.296 2.788,-32.296 ; 2.484,-32.246 2.788,-32.246 ; 2.484,-32.195 2.788,-32.195 ; 2.484,-32.144 2.738,-32.144 ; 2.484,-32.093 2.788,-32.093 ; 2.484,-32.042 2.788,-32.042 ; 2.484,-31.992 2.788,-31.992 ; 2.484,-31.941 2.788,-31.941 ; 2.484,-31.89 2.788,-31.89 ; 2.484,-31.839 2.788,-31.839 ; 2.484,-31.788 2.738,-31.788 ; 2.484,-31.738 2.738,-31.738 ; 2.484,-31.687 2.738,-31.687 ; 2.484,-31.636 2.788,-31.636 ; 2.484,-31.585 2.788,-31.585 ; 2.484,-31.534 2.788,-31.534 ; 2.484,-31.484 2.788,-31.484 ; 2.484,-31.433 2.788,-31.433 ; 2.484,-31.382 2.788,-31.382 ; 2.484,-31.331 2.788,-31.331 ; 2.484,-31.28 2.788,-31.28 ; 2.484,-31.23 2.738,-31.23 ; 2.484,-31.179 2.738,-31.179 ; 2.484,-30.671 2.788,-30.671 ; 2.484,-30.62 2.839,-30.62 ; 2.484,-30.569 2.534,-30.569 ; 2.484,-30.315 3.855,-30.315 ; 2.484,-30.264 3.804,-30.264 ; 2.484,-30.112 3.804,-30.112 ; 2.484,-30.061 3.804,-30.061 ; 2.484,-30.01 3.804,-30.01 ; 2.484,-29.909 3.804,-29.909 ; 2.484,-29.858 3.804,-29.858 ; 2.484,-29.807 3.804,-29.807 ; 2.484,-29.756 3.804,-29.756 ; 2.484,-27.267 4.617,-27.267 ; 2.484,-25.896 2.839,-25.896 ; 2.484,-25.845 2.839,-25.845 ; 2.484,-25.794 2.839,-25.794 ; 2.484,-24.93 3.195,-24.93 ; 2.534,-30.214 3.804,-30.214 ; 2.534,-30.163 3.804,-30.163 ; 2.534,-29.96 3.804,-29.96 ; 2.534,-26.251 2.839,-26.251 ; 2.534,-26.2 2.839,-26.2 ; 2.534,-25.946 2.839,-25.946 ; 2.534,-25.032 3.246,-25.032 ; 2.534,-24.981 3.246,-24.981 ; 2.585,-33.414 4.617,-33.414 ; 2.585,-30.569 2.636,-30.569 ; 2.585,-30.468 3.855,-30.468 ; 2.585,-26.15 2.839,-26.15 ; 2.585,-26.099 2.839,-26.099 ; 2.585,-26.048 2.839,-26.048 ; 2.585,-25.997 2.89,-25.997 ; 2.585,-25.083 3.296,-25.083 ; 2.636,-30.518 2.687,-30.518 ; 2.636,-25.184 3.398,-25.184 ; 2.636,-25.134 3.347,-25.134 ; 2.687,-25.235 3.398,-25.235 ; 2.738,-27.877 3.703,-27.877 ; 2.738,-27.826 3.093,-27.826 ; 2.738,-27.775 3.042,-27.775 ; 2.738,-27.724 3.042,-27.724 ; 2.738,-25.286 3.449,-25.286 ; 2.788,-30.569 2.839,-30.569 ; 2.788,-27.674 3.042,-27.674 ; 2.788,-25.337 3.5,-25.337 ; 2.839,-32.652 2.89,-32.652 ; 2.839,-30.518 2.992,-30.518 ; 2.839,-27.623 2.992,-27.623 ; 2.839,-25.438 3.601,-25.438 ; 2.839,-25.388 3.55,-25.388 ; 2.89,-25.489 3.601,-25.489 ; 2.941,-32.652 5.176,-32.652 ; 2.941,-25.54 3.652,-25.54 ; 2.992,-25.591 3.703,-25.591 ; 3.042,-25.642 3.754,-25.642 ; 3.093,-30.671 3.195,-30.671 ; 3.093,-30.62 3.195,-30.62 ; 3.093,-30.518 3.855,-30.518 ; 3.093,-25.692 3.804,-25.692 ; 3.144,-30.569 3.195,-30.569 ; 3.144,-25.794 3.855,-25.794 ; 3.144,-25.743 3.804,-25.743 ; 3.195,-25.845 3.906,-25.845 ; 3.246,-25.896 3.906,-25.896 ; 3.296,-25.997 4.008,-25.997 ; 3.296,-25.946 3.957,-25.946 ; 3.347,-26.048 4.058,-26.048 ; 3.398,-27.826 3.652,-27.826 ; 3.398,-26.15 4.109,-26.15 ; 3.398,-26.099 4.058,-26.099 ; 3.449,-27.216 4.617,-27.216 ; 3.449,-26.2 4.16,-26.2 ; 3.5,-30.569 3.804,-30.569 ; 3.5,-26.302 4.211,-26.302 ; 3.5,-26.251 4.16,-26.251 ; 3.55,-26.353 4.262,-26.353 ; 3.601,-26.454 4.312,-26.454 ; 3.601,-26.404 4.262,-26.404 ; 3.652,-26.505 4.363,-26.505 ; 3.703,-26.607 4.363,-26.607 ; 3.703,-26.556 4.363,-26.556 ; 3.754,-26.708 4.414,-26.708 ; 3.754,-26.658 4.414,-26.658 ; 3.804,-26.759 4.465,-26.759 ; 3.855,-27.166 4.617,-27.166 ; 3.855,-26.861 4.465,-26.861 ; 3.855,-26.81 4.465,-26.81 ; 3.906,-26.962 4.516,-26.962 ; 3.906,-26.912 4.465,-26.912 ; 3.957,-27.115 4.617,-27.115 ; 3.957,-27.064 4.566,-27.064 ; 3.957,-27.013 4.516,-27.013 ; 4.058,-32.093 4.16,-32.093 ; 4.109,-32.144 4.82,-32.144 ; 4.16,-32.601 5.176,-32.601 ; 4.16,-32.55 4.77,-32.55 ; 4.16,-32.5 4.77,-32.5 ; 4.16,-32.449 4.77,-32.449 ; 4.16,-32.398 4.77,-32.398 ; 4.16,-32.347 4.77,-32.347 ; 4.16,-32.296 4.77,-32.296 ; 4.16,-32.246 4.82,-32.246 ; 4.16,-32.195 4.82,-32.195 ; 4.16,-27.724 4.719,-27.724 ; 4.16,-27.674 4.719,-27.674 ; 4.211,-32.093 4.82,-32.093 ; 4.211,-32.042 4.82,-32.042 ; 4.211,-31.992 4.82,-31.992 ; 4.211,-31.941 4.82,-31.941 ; 4.211,-28.486 4.77,-28.486 ; 4.211,-28.436 4.77,-28.436 ; 4.211,-28.385 4.77,-28.385 ; 4.211,-28.334 4.77,-28.334 ; 4.211,-28.283 4.77,-28.283 ; 4.211,-28.232 4.77,-28.232 ; 4.211,-28.182 4.77,-28.182 ; 4.211,-28.131 4.77,-28.131 ; 4.211,-28.08 4.77,-28.08 ; 4.211,-28.029 4.719,-28.029 ; 4.211,-27.978 4.719,-27.978 ; 4.211,-27.928 4.719,-27.928 ; 4.211,-27.877 4.719,-27.877 ; 4.211,-27.826 4.719,-27.826 ; 4.211,-27.775 4.719,-27.775 ; 4.211,-27.623 4.668,-27.623 ; 4.211,-27.572 4.668,-27.572 ; 4.262,-31.89 4.82,-31.89 ; 4.262,-31.839 4.871,-31.839 ; 4.262,-29.045 4.871,-29.045 ; 4.262,-28.994 4.871,-28.994 ; 4.262,-28.944 4.82,-28.944 ; 4.262,-28.893 4.82,-28.893 ; 4.262,-28.842 4.82,-28.842 ; 4.262,-28.791 4.82,-28.791 ; 4.262,-28.74 4.82,-28.74 ; 4.262,-28.69 4.82,-28.69 ; 4.262,-28.639 4.82,-28.639 ; 4.262,-28.588 4.82,-28.588 ; 4.262,-28.537 4.77,-28.537 ; 4.262,-27.521 4.668,-27.521 ; 4.312,-31.788 4.871,-31.788 ; 4.312,-31.738 4.871,-31.738 ; 4.312,-31.687 4.871,-31.687 ; 4.312,-31.636 4.871,-31.636 ; 4.312,-31.585 4.871,-31.585 ; 4.312,-29.756 4.922,-29.756 ; 4.312,-29.706 4.871,-29.706 ; 4.312,-29.655 4.871,-29.655 ; 4.312,-29.604 4.871,-29.604 ; 4.312,-29.553 4.871,-29.553 ; 4.312,-29.502 4.871,-29.502 ; 4.312,-29.452 4.871,-29.452 ; 4.312,-29.401 4.871,-29.401 ; 4.312,-29.35 4.871,-29.35 ; 4.312,-29.299 4.871,-29.299 ; 4.312,-29.248 4.871,-29.248 ; 4.312,-29.198 4.871,-29.198 ; 4.312,-29.147 4.871,-29.147 ; 4.312,-29.096 4.871,-29.096 ; 4.363,-31.534 4.922,-31.534 ; 4.363,-31.484 4.922,-31.484 ; 4.363,-31.433 4.922,-31.433 ; 4.363,-31.382 4.922,-31.382 ; 4.363,-30.061 4.922,-30.061 ; 4.363,-30.01 4.922,-30.01 ; 4.363,-29.96 4.922,-29.96 ; 4.363,-29.909 4.922,-29.909 ; 4.363,-29.858 4.922,-29.858 ; 4.363,-29.807 4.922,-29.807 ; 4.414,-31.331 4.922,-31.331 ; 4.414,-31.28 4.922,-31.28 ; 4.414,-31.23 4.922,-31.23 ; 4.414,-31.179 4.973,-31.179 ; 4.414,-31.077 4.973,-31.077 ; 4.414,-30.468 4.973,-30.468 ; 4.414,-30.417 4.973,-30.417 ; 4.414,-30.366 4.973,-30.366 ; 4.414,-30.315 4.973,-30.315 ; 4.414,-30.264 4.922,-30.264 ; 4.414,-30.214 4.922,-30.214 ; 4.414,-30.163 4.922,-30.163 ; 4.414,-30.112 4.922,-30.112 ; 4.465,-31.128 4.973,-31.128 ; 4.465,-31.026 4.973,-31.026 ; 4.465,-30.976 4.973,-30.976 ; 4.465,-30.925 4.973,-30.925 ; 4.465,-30.874 4.973,-30.874 ; 4.465,-30.823 4.973,-30.823 ; 4.465,-30.772 4.973,-30.772 ; 4.465,-30.722 4.973,-30.722 ; 4.465,-30.671 4.973,-30.671 ; 4.465,-30.62 4.973,-30.62 ; 4.465,-30.569 4.973,-30.569 ; 4.465,-30.518 4.973,-30.518

## Polygon pours and split planes (outlines as drawn)
GND on Top Layer "GND_L01_P000" (solid, pour order 0): -3.255,2.98 69.715,2.98 69.715,-34.246 -3.229,-34.246
GND on Bottom Layer "GND_L02_P001" (solid, pour order 1): -3.002,2.98 69.948,2.98 69.934,0.274 69.934,-34.246 -3.014,-34.246

## Keep-outs
Keep-Out Layer:
  lines w0.254: -2.965,-31.899 -2.965,0.905 ; -2.965,-31.873 ccw(c-0.806,-31.873) -0.806,-34.032 28.917,-34.032 ; -2.965,0.933 cw(c-0.933,0.933) -0.933,2.965 67.699,2.965 cw(c67.699,0.933) 69.731,0.933 ; 36.247,-33.453 36.247,-33.351 ; 48.474,-33.846 48.495,-33.866 ; 55.729,-34.032 67.572,-34.032 ; 67.572,-34.03 ccw(c67.572,-31.871) 69.731,-31.871 69.731,-26.537 69.731,-3.677 69.731,1.022

## Other copper
Top Layer:
  pour cut-out: 36.197,-34.12 36.501,-33.816 36.501,-32.767 47.965,-32.767 48.023,-32.709 48.237,-32.923 48.237,-33.672 48.541,-33.672 48.905,-34.037 48.741,-34.201 48.741,-34.204
Bottom Layer:
  pour cut-out: 36.197,-34.134 36.501,-33.83 36.501,-32.781 47.965,-32.781 48.023,-32.723 48.237,-32.937 48.237,-33.686 48.541,-33.686 48.905,-34.051 48.741,-34.215 48.741,-34.218

## Silkscreen, mask and mechanical layers (free items; w line width, h text height)
Top Overlay:
  lines w0.254: 59.46,-0.414 66.826,-0.414 ; 60.26,-2.739 63.308,-2.739 ; 62.85,-0.226 65.898,-0.226
  text "DWNLD" at 57.953,0.933 h1 r270
  text "VOICE" at 67.699,0.933 h1 r270
Top Paste:
  drawing of 681 lines, arcs and shapes, not listed
Top Solder:
  drawing of 681 lines, arcs and shapes, not listed

## Dimensions
-0.933,2.965 to -0.806,-34.032 on Top Overlay
-2.965,-31.873 to 69.731,-31.871 on Top Overlay